# Altium PCB Funduscope_PCB.PcbDoc
Units mm, origin at the board's own origin, x right, y up, seen from the top; angles counter-clockwise.
Board outline 59.99 x 40 mm, 2 copper layers (Top Layer, Bottom Layer); 8 components, 11 nets, 58 pads, 0 vias.
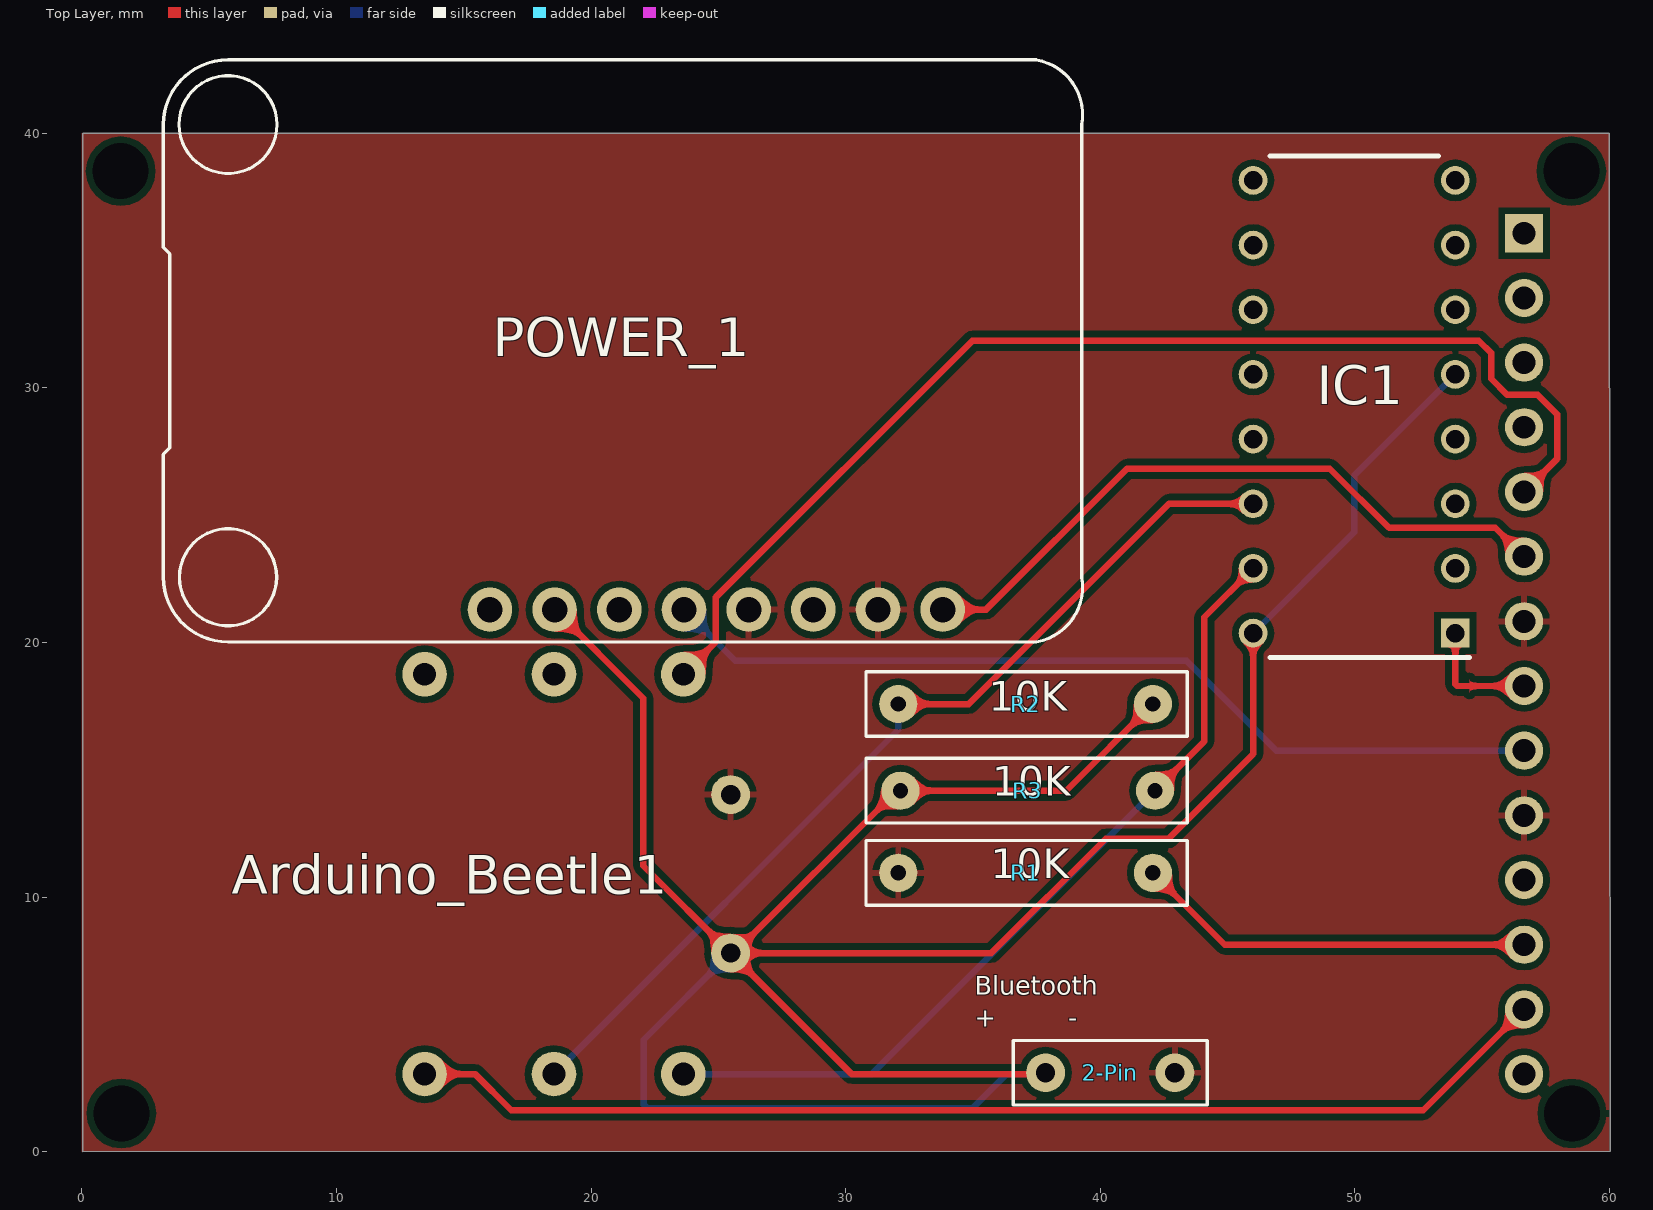
[diagram p0: Top Layer view]
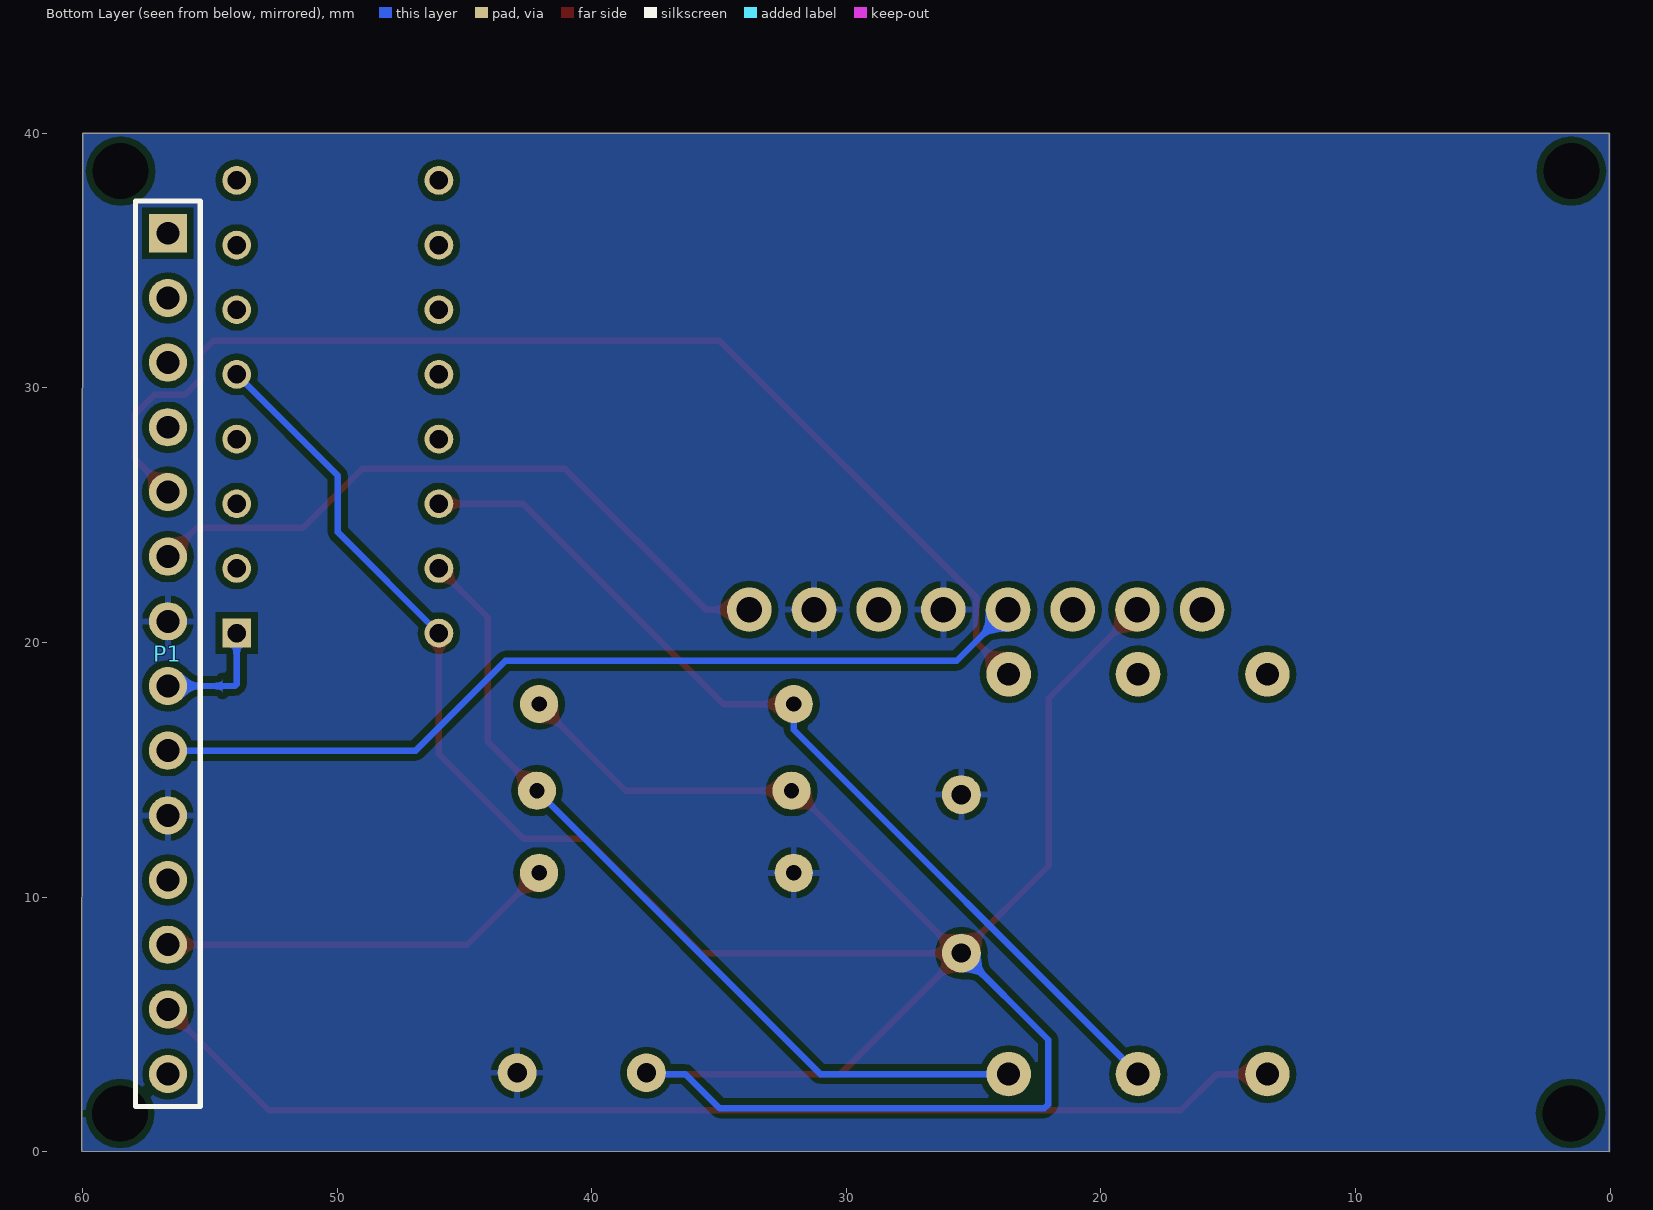
[diagram p1: Bottom Layer view, seen from below]
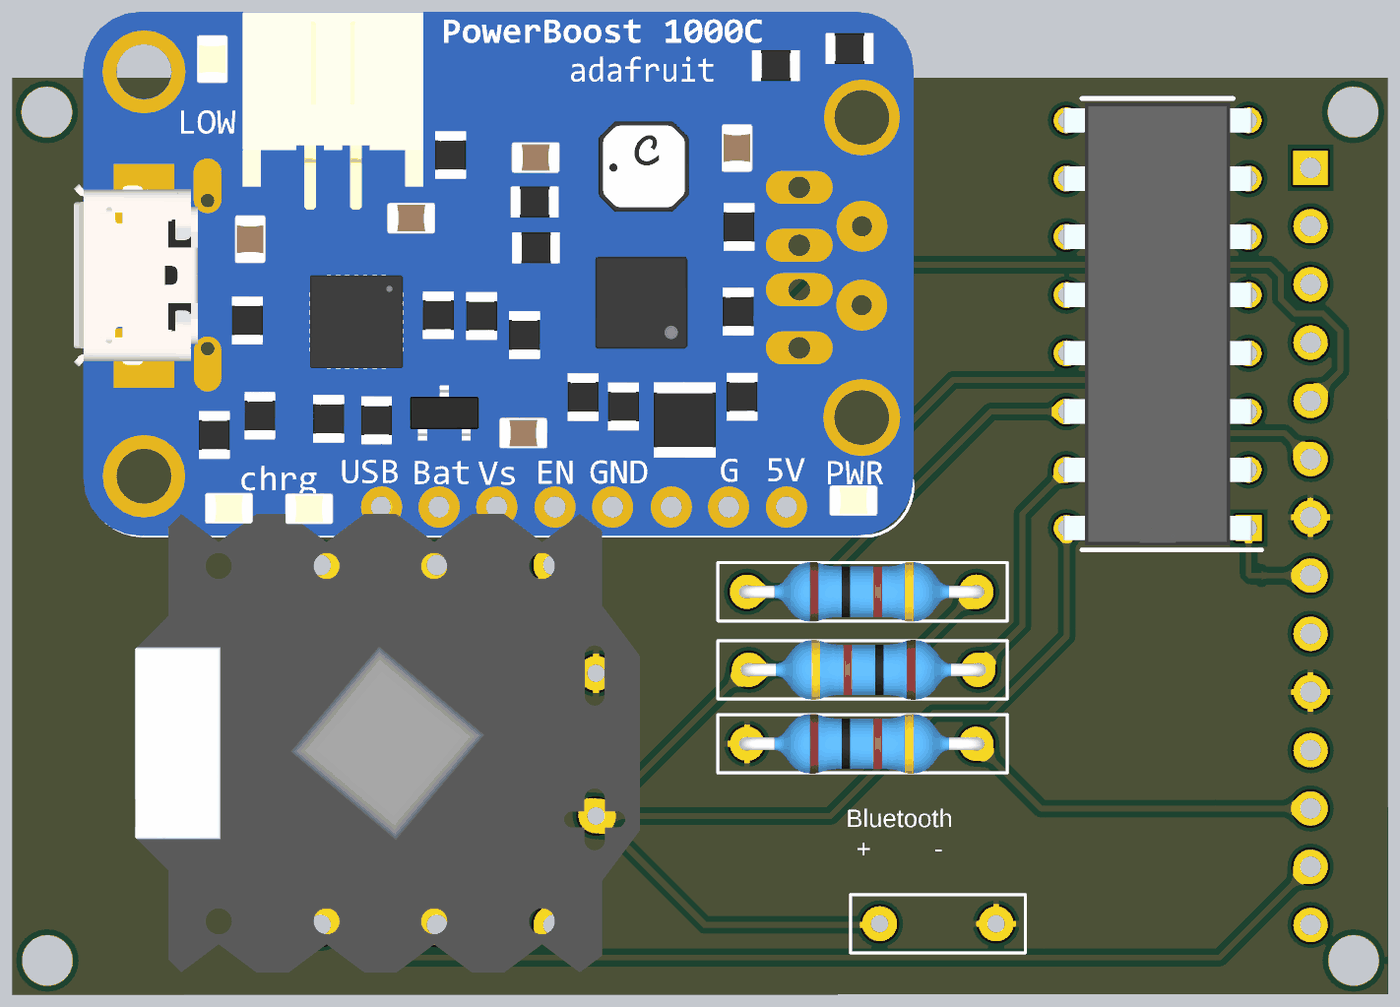
[diagram p2: 3D render of the assembled board from above, using the file's embedded part models]

## Layer stack, top to bottom
Top Solder: solder mask 0.0102, Solder Resist, Dk 3.5
Top Layer: signal copper 0.0356
Dielectric 1: dielectric 0.32, FR-4, Dk 4.8
Bottom Layer: signal copper 0.0356
Bottom Solder: solder mask 0.0102, Solder Resist, Dk 3.5

## Board outline
0.025,0.003 60.02,0.025 59.995,40.005 0.025,40.005

## Design rules (kind name [scope] priority, off if disabled: settings)
Clearance [All] p1: gap=0.254 ignorepadtopadclearanceinfootprint=FALSE except(0: Arc-Hole Track-Hole SMDPad-Hole THPad-Hole Via-Hole Fill-Hole Poly-Hole Region-Hole Text-Hole)
PolygonConnect [All] p1: connectstyle=Relief reliefconductorwidth=0.254 reliefentries=4 polygonreliefangle="90 Angle" airgapwidth=0.254
RoutingVias [All] p1: holewidth=0.711 width=1.27 viastyle="Through Hole" minholewidth=0.711 minwidth=1.27 maxholewidth=0.711 maxwidth=1.27
SolderMaskExpansion [All] p1: expansion=0.102 istentingtop=FALSE
Width [All] p1: maxlimit=0.254 minlimit=0.254 preferedwidth=0.254
30 further rules are at their usual default settings.

## Components (designator, comment, footprint, x,y, rotation, side; value= is the part's Value field where it differs from the comment)
2-Pin "Connector" "HEADER HEADER 2 PIN" 37.846,3.099 r0 top
Arduino_Beetle1 "Arduino_Beetle" ARDUINO_BEETLE 23.622,18.748 r180 top locked
IC1 "CD4043BE" DIP794W53P254L1930H508Q16N 49.969,29.254 r180 top locked
P1 "Header 14" HDR1X14 56.642,36.068 r270 bottom locked
POWER_1 "ADAFRUIT_POWER_BOOST" "ADAFRUIT_POWER_BOOST_1000C 2" 19.774,30.813 r0 top locked
R1 "10K ohm" "10K RESISTOR" 32.062,10.95 r0 top
R2 "10K ohm" "10K RESISTOR" 32.062,17.58 r0 top
R3 "10K ohm" "10K RESISTOR" 42.146,14.176 r180 top

## Footprints (in the part's own frame and the unit in brackets; to place one, negate y for a bottom-side part, rotate by r counter-clockwise, add the part's x,y. Pads: shape width x height; smd on the part's side, far side on the other; paste and mask are expansions set on the pad)
"10K RESISTOR" [mm]
  round 1.5 hole 0.6: 1(0,0) 2(10,0)
  silkscreen extent -1.27,-1.27 11.35,1.27, body extent -0.35,-1.3 10.36,1.3, height 2.69
"ADAFRUIT_POWER_BOOST_1000C 2" [mm] "No Header"
  round 1.75 / inner round 1.524 / far side round 1.75 hole 1: 5V(14.034,-9.525) EN(3.873,-9.525) GND(6.413,-9.525) GND(11.493,-9.525) LB0(8.954,-9.525) USB(-3.746,-9.525) VBAT(-1.206,-9.525) VS(1.333,-9.525)
  silkscreen extent -16.57,-10.8 19.53,12.07, body extent -17.08,-10.79 19.55,12.06, height 6.4
ARDUINO_BEETLE [mm]
  round 1.75 hole 0.9: 1(10.16,15.7) 2(5.08,15.7) 3(0,15.7) 4(10.16,0) 5(5.08,0) 6(0,0)
  round 1.524 hole 0.762: +(-1.854,10.947) -(-1.854,4.724)
  body extent -3.76,-2.23 18.24,17.77, height 3.8
DIP794W53P254L1930H508Q16N [mm]
  rect 1.13x1.13 hole 0.73: 1(-3.97,8.89)
  round 1.13 hole 0.73: 2(-3.97,6.35) 3(-3.97,3.81) 4(-3.97,1.27) 5(-3.97,-1.27) 6(-3.97,-3.81) 7(-3.97,-6.35) 8(-3.97,-8.89) 9(3.97,-8.89) 10(3.97,-6.35) 11(3.97,-3.81) 12(3.97,-1.27) 13(3.97,1.27) 14(3.97,3.81) 15(3.97,6.35) 16(3.97,8.89)
  silkscreen extent -4.53,-9.84 3.3,9.84, body extent -4.1,-9.65 4.1,9.65, height 5.08
HDR1X14 [mm]
  rect 1.5x1.5 hole 0.9: 1(0,0)
  round 1.5 hole 0.9: 2(2.54,0) 3(5.08,0) 4(7.62,0) 5(10.16,0) 6(12.7,0) 7(15.24,0) 8(17.78,0) 9(20.32,0) 10(22.86,0) 11(25.4,0) 12(27.94,0) 13(30.48,0) 14(33.02,0)
  silkscreen extent -1.27,-1.27 34.29,1.27
"HEADER HEADER 2 PIN" [mil] "6 Pin Single Row"
  round 60 hole 30: 1(0,0) 2(200,0)
  silkscreen extent -50,-50 250,50

## Part data
2-Pin: library part 2-Pin, "2-Pin connector with the spacing of one 2.54mm through hole"
IC1: "Integrated Circuit", Manufacturer_Name="Texas Instruments", Mouser Part Number=595-CD4043BE, Supplier Part Number 1=296-2050-ND, Arrow Part Number=CD4043BE, Arrow Price/Stock=https://www.arrow.com/en/products/cd4043be/texas-instruments, Datasheet Link=http://www.ti.com/lit/ds/symlink/cd4043b.pdf, Height=5.08mm, MANUFACTURER_PART_NUMBER=CD4043BE, Mouser Price/Stock=https://www.mouser.co.uk/ProductDetail/Texas-Instruments/CD4043BE?qs=5h8QSfodyRh52gnjNYecnw%3D%3D, Supplier 1=Digi-Key
P1: "Header, 14-Pin", LatestRevisionDate=17-Jul-2002, LatestRevisionNote="Re-released for DXP Platform.", Publisher="Altium Limited"
POWER_1: Package=ADAFRUIT_POWER_BOOST_1000C, DeviceSetName=ADAFRUIT_POWER_BOOST, GateName_1=G$1, LibraryName=adafruit_power_1000c, SymbolName_1=ADAFRUIT_POWER_BOOST
R1 R2 R3: library part 10K, "Through-Hole", Supplier Part Number 1=10.0KXBK-ND, Supplier 1=Digi-Key

## Free pads (board coordinates)
  round 1.524 hole 2.2: 9(1.524,38.506) 9(1.549,1.499) 9(58.496,38.506) 9(58.522,1.499)

## Nets (pads, with @x,y where several pads share a name; then routed paths per layer and width w, separated by ;. In a path a pad name is that pad's centre, name@x,y a point inside that pad or via, vN(x,y) a via of type N, cw(c..) or ccw(c..) an arc to the next point about the centre after c; other vN are vias at no path point)
+5: P1.6 POWER_1.5V | length 26.6
  Top Layer w0.254: POWER_1.5V 35.512,21.288 41.046,26.822 49.013,26.822 51.337,24.498 55.512,24.498 P1.6
BluetoothPin: P1.14
GND: 2-Pin.2 Arduino_Beetle1.- P1.7 P1.10 POWER_1.GND R1.1
NetArduino_Beetle1_1: Arduino_Beetle1.1 P1.13 | length 45.4
  Top Layer w0.254: Arduino_Beetle1.1 15.443,3.048 16.866,1.626 52.68,1.626 P1.13
NetArduino_Beetle1_2: Arduino_Beetle1.2 IC1.14 R2.1 | length 37.3
  Top Layer w0.254: R2.1 34.831,17.58 42.696,25.444 IC1.14
  Bottom Layer w0.254: Arduino_Beetle1.2 32.062,16.568 R2.1
NetArduino_Beetle1_3: Arduino_Beetle1.3 IC1.15 R3.1 | length 33.5
  Top Layer w0.254: R3.1 44.079,16.109 44.079,20.984 IC1.15
  Bottom Layer w0.254: Arduino_Beetle1.3 31.018,3.048 R3.1
NetArduino_Beetle1_6: Arduino_Beetle1.6 P1.5 | length 46.1
  Top Layer w0.254: Arduino_Beetle1.6 24.903,20.029 24.903,21.78 34.975,31.852 54.864,31.852 55.347,31.369 55.347,30.353 55.982,29.718 57.175,29.718 57.937,28.956 57.937,27.203 P1.5
NetIC1_1: IC1.1 P1.8 | length 9.5
  Top Layer w0.254: IC1.1 53.939,18.364 54.016,18.288 P1.8
  Bottom Layer w0.254: IC1.1 53.939,18.364 54.016,18.288 P1.8
NetP1_9: P1.9 POWER_1.EN | length 35.3
  Bottom Layer w0.254: POWER_1.EN 25.657,19.279 43.383,19.279 46.914,15.748 P1.9
NetP1_12: P1.12 R1.2 | length 15.7
  Top Layer w0.254: R1.2 44.885,8.128 P1.12
VBAT: 2-Pin.1 Arduino_Beetle1.+ IC1.5 IC1.16 POWER_1.VBAT R2.2 R3.2 | length 116.8
  Top Layer w0.254: POWER_1.VBAT 22.043,17.812 22.043,11.233 Arduino_Beetle1.+ Arduino_Beetle1.+@25.623,7.801 ; Arduino_Beetle1.+@25.55,7.727 30.229,3.048 37.795,3.048 2-Pin.1 ; R2.2 38.659,14.176 R3.2 31.999,14.176 Arduino_Beetle1.+@25.623,7.801 ; IC1.16 45.999,15.621 42.672,12.294 40.208,12.294 35.715,7.801 Arduino_Beetle1.+@25.623,7.801
  Bottom Layer w0.254: Arduino_Beetle1.+ 22.073,4.397 22.073,1.851 22.221,1.702 34.976,1.702 36.322,3.048 37.795,3.048 2-Pin.1 ; IC1.16 49.969,24.334 49.969,26.554 IC1.5
pads on no net: Arduino_Beetle1.4 Arduino_Beetle1.5 IC1.2 IC1.3 IC1.4 IC1.6 IC1.7 IC1.8 IC1.9 IC1.10 IC1.11 IC1.12 IC1.13 P1.1 P1.2 P1.3 P1.4 P1.11 POWER_1.LB0 POWER_1.USB POWER_1.VS

## Polygon pours and split planes (outlines as drawn)
GND on Bottom Layer "GND_L02_P000" (solid, pour order 0): 0,0 59.995,0 59.995,40.005 0,40.005
GND on Top Layer "GND_L01_P002" (solid, pour order 2): 0,0 59.995,0 59.995,40.005 0,40.005

## Silkscreen, mask and mechanical layers (free items; w line width, h text height)
Top Overlay:
  text "10K" at 35.618,16.916 h2
  text "10K" at 35.745,13.589 h2
  text "10K" at 35.694,10.338 h2
  text "Bluetooth  / +         -" at 35.06,4.648 h1.25
Mechanical 2:
  lines w0.127: 0.025,0.003 60.025,0.003 60.025,40.003 0.025,40.003 0.025,0.003